# EAGLE board CANdiy-Shield_v12 (EAGLE 6.4)
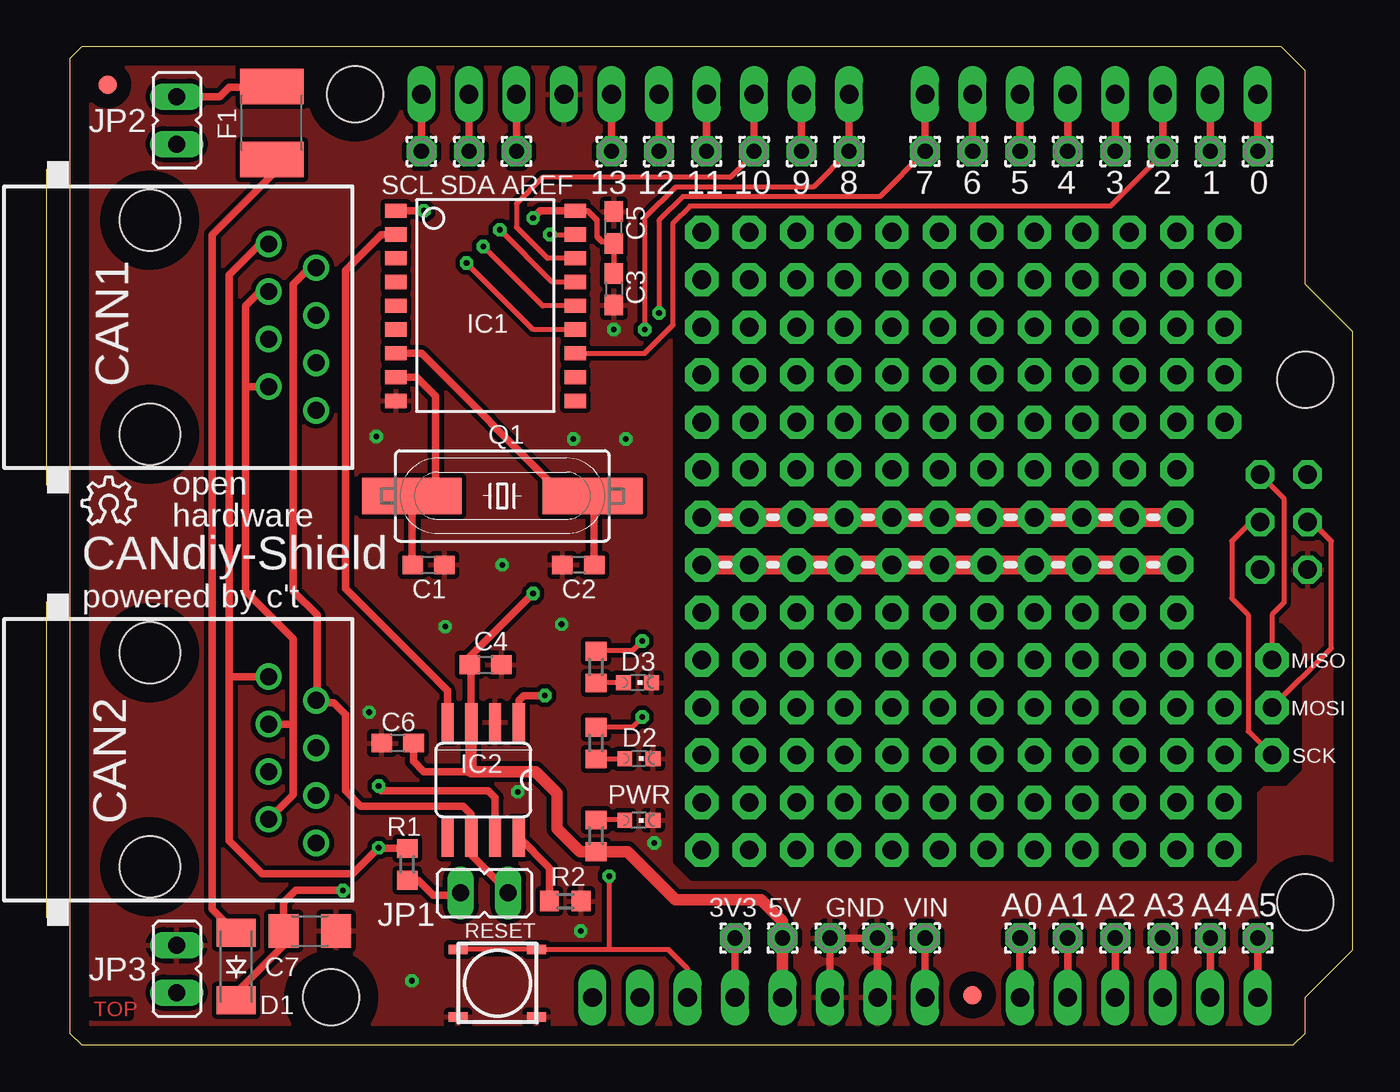
[diagram p0: board, top side]
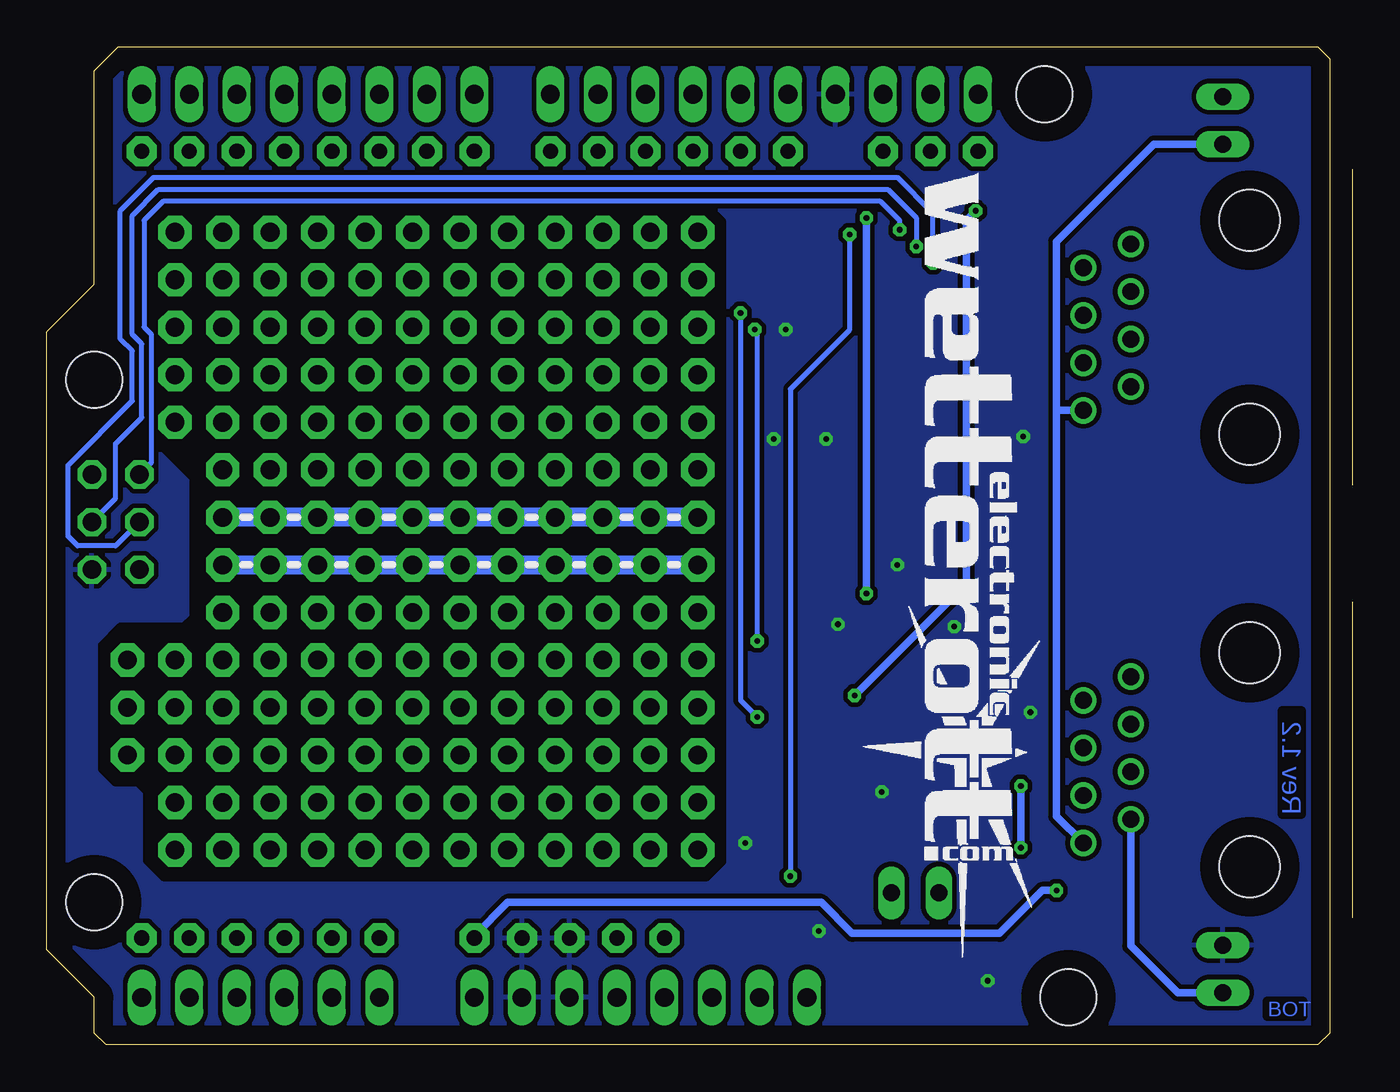
[diagram p1: board, bottom side, seen from below]

Size 69.81 x 53.34 mm. Coordinates in mm from the lower left corner, seen from the top.
Copper layers (1*16): Top 0.035mm / dielectric 1.5mm / Bottom 0.035mm
Design rules "default *": minimum track width 8mil, minimum drill 0.3mm, track to track 8mil, track to pad 8mil, pad to pad 8mil, via to via 8mil, smd to smd 8mil, copper to edge 40mil, drill to drill 8mil, minimum pad ring 10mil, minimum via ring 8mil, stop-mask expansion 4mil, vias tented up to drill 0.6mm, thermal gap 10mil

## Footprints (pad centres in the part's own frame; a part is rotated, then mirrored left to right if it is on the bottom)
1,6/0,8 = drill 0.813 pad 1.6 octagon: 1 0,0
UNO_ISP = drill 1 long: 0 63.5,50.8; 1 60.96,50.8; 2 58.42,50.8; 3 55.88,50.8; 3V3 35.56,2.54; 4 53.34,50.8; 5 50.8,50.8; 5V 38.1,2.54; 6 48.26,50.8; 7 45.72,50.8; 8 41.656,50.8; 9 39.116,50.8; 10 36.576,50.8; 11 34.036,50.8; 12 31.496,50.8; 13 28.956,50.8; AIN0 50.8,2.54; AIN1 53.34,2.54; AIN2 55.88,2.54; AIN3 58.42,2.54; AIN4 60.96,2.54; AIN5 63.5,2.54; AREF 23.876,50.8; GND@1 40.64,2.54; GND@2 43.18,2.54; GND@3 26.416,50.8; IOREF 30.48,2.54; NC 27.94,2.54; RST 33.02,2.54; SCL 18.796,50.8; SDA 21.336,50.8; VIN 45.72,2.54 | drill 1 octagon: GND@4 66.167,25.4; MISO 63.627,30.48; MOSI 66.167,27.94; RST2 63.627,25.4; SCK 63.627,27.94; VCC 66.167,30.48 | hole 3: 66.04,35.56; 66.04,7.62; 15.24,50.8; 13.97,2.54
C0603 = smd 1.1 x 1: 1 -0.85,0; 2 0.85,0
C1206 = smd 1.6 x 1.8: 1 -1.4,0; 2 1.4,0
RJ45-NO-SHIELD = drill 0.9 pad 1.4: 1 -4.445,6.35; 2 -3.175,8.89; 3 -1.905,6.35; 4 -0.635,8.89; 5 0.635,6.35; 6 1.905,8.89; 7 3.175,6.35; 8 4.445,8.89 | hole 3.251: -5.715,0; 5.715,0
SOD-123_MINI-SMA = smd 1.5 x 2.1: A 1.8,0; C -1.8,0
CHIPLED_0603 = smd 0.8 x 0.8: A 0,-0.75; C 0,0.75
L1812 = smd 1.9 x 3.4: 1 -1.95,0; 2 1.95,0
SO-18W = smd 0.762 x 1.143: 1 -5.08,-4.788; 2 -3.81,-4.788; 3 -2.54,-4.788; 4 -1.27,-4.788; 5 0,-4.788; 6 1.27,-4.788; 7 2.54,-4.788; 8 3.81,-4.788; 9 5.08,-4.788; 10 5.08,4.788; 11 3.81,4.788; 12 2.54,4.788; 13 1.27,4.788; 14 0,4.788; 15 -1.27,4.788; 16 -2.54,4.788; 17 -3.81,4.788; 18 -5.08,4.788
SO08 = smd 0.66 x 2.032: 1 -1.905,-3.073; 2 -0.635,-3.073; 3 0.635,-3.073; 4 1.905,-3.073; 5 1.905,3.073; 6 0.635,3.073; 7 -0.635,3.073; 8 -1.905,3.073
JP1 = drill 0.914 long: 1 0,-1.27; 2 0,1.27
HC49UP = smd 5.334 x 1.93: 1 -4.826,0; 2 4.826,0
R0603 = smd 1 x 1.1: 1 -0.85,0; 2 0.85,0
SW_SMD4 = smd 0.508 x 1.016: 1 -1.8,-2.1; 2 1.8,-2.1; 3 1.8,2.1; 4 -1.8,2.1
ROUND_1MM = smd 1 x 1: P$1 0,0

## Placement (x,y rotation side)
0  [1,6/0,8]  64.73,47.75 180 top
1  [1,6/0,8]  62.19,47.75 180 top
2  [1,6/0,8]  59.65,47.75 180 top
3  [1,6/0,8]  57.11,47.75 180 top
3V3  [1,6/0,8]  36.79,5.71 0 top
4  [1,6/0,8]  54.57,47.75 180 top
5  [1,6/0,8]  52.03,47.75 180 top
5V  [1,6/0,8]  39.33,5.71 0 top
6  [1,6/0,8]  49.49,47.75 180 top
7  [1,6/0,8]  46.95,47.75 180 top
8  [1,6/0,8]  42.89,47.75 180 top
9  [1,6/0,8]  40.35,47.75 180 top
10  [1,6/0,8]  37.81,47.75 180 top
11  [1,6/0,8]  35.27,47.75 180 top
12  [1,6/0,8]  32.73,47.75 180 top
13  [1,6/0,8]  30.19,47.75 180 top
A0  [1,6/0,8]  52.03,5.71 0 top
A1  [1,6/0,8]  54.57,5.71 0 top
A2  [1,6/0,8]  57.11,5.71 0 top
A3  [1,6/0,8]  59.65,5.71 0 top
A4  [1,6/0,8]  62.19,5.71 0 top
A5  [1,6/0,8]  64.73,5.71 0 top
ARD  UNO_ISP  [UNO_ISP]  1.23,0 0 top
AREF  [1,6/0,8]  25.11,47.75 0 top
C1  22p  [C0603]  20.41,25.65 0 top
C2  22p  [C0603]  28.41,25.65 180 top
C3  2µ2  [C0603]  30.31,40.39 270 top
C4  100nF  [C0603]  23.46,20.32 0 top
C5  100nF  [C0603]  30.31,43.69 90 top
C6  2µ2  [C0603]  18.76,16.13 180 top
C7  4µ7  [C1206]  14.06,6.1 0 top
CAN1  RJ45-6L-B  [RJ45-NO-SHIELD]  5.51,38.35 270 top
CAN2  RJ45-6L-B  [RJ45-NO-SHIELD]  5.51,15.24 270 top
D1  [SOD-123_MINI-SMA]  10.12,4.19 90 top
D2  [CHIPLED_0603]  31.65,15.3 270 top
D3  [CHIPLED_0603]  31.58,19.37 270 top
F1  F1  [L1812]  12.03,49.28 90 top
GND  [1,6/0,8]  41.87,5.71 0 top
GND.  [1,6/0,8]  44.41,5.71 0 top
IC1  [SO-18W]  23.46,39.5 270 top
IC2  MCP2551SO8  [SO08]  23.33,14.16 180 top
JP1  [JP1]  23.39,8.13 90 top
JP2  [JP1]  6.95,49.4 0 top
JP3  [JP1]  6.95,4.06 0 top
LOGO2  OSHW_LOGO_6MILX0100-NT  [OSHW_6X100_NOTEXT]  1.9,27.81 0 top
PWR  [CHIPLED_0603]  31.65,12 270 top
Q1  16MHz  [HC49UP]  24.35,29.34 180 top
R1  120  [R0603]  19.27,9.65 90 top
R2  100k  [R0603]  27.71,7.68 0 top
R3  1k  [R0603]  29.36,20.19 270 top
R4  1k  [R0603]  29.36,11.18 90 top
R5  1k  [R0603]  29.36,16.13 270 top
RESET  SW_SMDS  [SW_SMD4]  24.09,3.3 270 top
SCL  [1,6/0,8]  20.03,47.75 180 top
SDA  [1,6/0,8]  22.57,47.75 180 top
U$1  WE-LOGO  [WE-LOGO]  26.5,46.86 270 bottom
VIN  [1,6/0,8]  46.95,5.71 0 top
X_1  PASS_1MM  [ROUND_1MM]  3.26,51.31 0 top
X_2  PASS_1MM  [ROUND_1MM]  49.49,2.67 0 top

## Library data of the parts
0 1-3 3V3 4 5 5V 6-13 A0 A1-A5 AREF GND GND. SCL SDA VIN = wirepad
ARD = Arduino
C1-C7 F1 R1 R2 = resistor
CAN1 CAN2 = con-tycoelectronics; MPN: RJ45-6L-B; OC_FARNELL: unknown; OC_NEWARK: 16R6090
D1 = diode
D2 D3 PWR = led
IC1 IC2 = can
JP1-JP3 = jumper
LOGO2 = OSHW
Q1 = crystal; OC_FARNELL: unknown; OC_NEWARK: unknown
R3-R5 = rcl
RESET = Switch-SMD
U$1 = welectronic
X_1 X_2 = marks

## Nets
3V3: 3V3.1 ARD.3V3
5V: 5V.1 ARD.5V C3.1 C4.1 C5.1 C6.1 IC1.18 IC2.3 R4.1
7: 7.1 ARD.7 R5.1
8: 8.1 ARD.8 R3.1
9: 9.1 ARD.9
A0: A0.1 ARD.AIN0
AERF: ARD.AREF AREF.1
CANH: CAN1.1 CAN2.1 IC2.7 R1.2
CANL: CAN1.2 CAN2.2 IC2.6 JP1.1
CS: 10.1 ARD.10 IC1.16
GND: ARD.GND@1 ARD.GND@2 ARD.GND@3 ARD.GND@4 C1.2 C2.2 C3.2 C4.2 C5.2 C6.2 C7.2 D2.C D3.C GND.1 GND..1 IC1.9 IC2.2 JP3.2 PWR.C R2.2 RESET.2 RESET.3
INT: 2.1 ARD.2 IC1.12
IOREF: ARD.IOREF
N$4: C2.1 IC1.7 Q1.1
N$5: C1.1 IC1.8 Q1.2
N$6: CAN1.8 CAN2.8 JP2.1
N$7: IC2.8 R2.1
N$8: CAN1.3 CAN1.7 CAN2.3 CAN2.7 JP3.1
N$9: JP1.2 R1.1
N$18: ARD.SCL SCL.1
N$19: ARD.SDA SDA.1
N$21: D3.A R3.2
N$22: PWR.A R4.2
N$23: D2.A R5.2
N$86: 11.1 ARD.11
N$87: 12.1 ARD.12
N$88: 13.1 ARD.13
N$98: 6.1 ARD.6
N$99: 5.1 ARD.5
N$100: 4.1 ARD.4
N$101: 3.1 ARD.3
N$102: 1.1 ARD.1
N$103: 0.1 ARD.0
N$114: A1.1 ARD.AIN1
N$115: A2.1 ARD.AIN2
N$116: A3.1 ARD.AIN3
N$117: A4.1 ARD.AIN4
N$118: A5.1 ARD.AIN5
N$120: D1.A F1.1
N$121: F1.2 JP2.2
RESET: ARD.RST IC1.17 RESET.1 RESET.4
RXCAN: IC1.2 IC2.4
SCK: ARD.SCK IC1.13
SI: ARD.MOSI IC1.14
SO: ARD.MISO IC1.15
TXCAN: IC1.1 IC2.1
VIN: ARD.VIN C7.1 D1.C VIN.1

## Tracks (layer width: path | path; a pad name or v marks a point on that pad's centre or on a via)
3V3
  Top 0.406: ARD.3V3 3V3.1
5V  (via drill 0.3)
  Top 0.305: C3.1 C5.1 30.23,42.93 29.68,42.93 29.43,43.18 29.43,44.07 28.92,44.58 IC1.18
  Top 0.406: C6.1 19.61,15.15 20.15,14.61 22.69,14.61 | v26,44.2 26.38,44.58 IC1.18 | IC2.3 22.69,20.23 C4.1 22.61,20.74 v26,24.13
  Top 0.61: ARD.5V 5V.1 39.33,6.6 38.19,7.75 33.62,7.75 31.04,10.33 R4.1 28.5,10.33 27.27,11.56 27.27,13.46 26.12,14.61 22.69,14.61 IC2.3
  Bottom 0.406: v26,24.13 v26,44.2
7  (via drill 0.3)
  Top 0.254: 7.1 44.54,45.34 34,45.34 32.73,44.07 v32.73,39.12 | R5.1 29.4,17.02 31.33,17.02 v31.84,17.53
  Top 0.406: ARD.7 7.1
  Bottom 0.254: v32.73,39.12 32.73,18.41 v31.84,17.53
8  (via drill 0.3)
  Top 0.254: 8.1 40.98,45.85 33.62,45.85 31.97,44.2 v31.97,38.23 | R3.1 29.4,21.08 31.33,21.08 v31.84,21.59
  Top 0.406: ARD.8 8.1
  Bottom 0.254: v31.97,38.23 31.84,38.1 v31.84,21.59
9
  Top 0.406: ARD.9 9.1
A0
  Top 0.406: ARD.AIN0 A0.1
AERF
  Top 0.406: AREF.1 ARD.AREF
CANH  (via drill 0.3)
  Top 0.406: 9.74,19.68 9.74,41.15 11.39,42.8 CAN1.1 | 9.74,19.68 9.74,10.92 11.52,9.14 16.34,9.14 v17.74,10.54 17.78,10.5 R1.2 | CAN2.1 9.74,19.68 | IC2.7 23.96,13.21 23.58,13.59 17.87,13.59 17.74,13.72 v17.74,13.84
  Bottom 0.406: v17.74,13.84 v17.74,10.54
CANL
  Top 0.406: JP1.1 24.66,8.19 22.69,10.16 IC2.6 22.69,12.32 22.25,12.76 16.79,12.76 15.96,13.59 15.96,17.65 15.33,18.29 14.53,18.29 CAN2.2 14.44,18.45 14.44,22.99 13.17,24.26 13.17,40.64 14.06,41.53 CAN1.2
CS
  Top 0.254: 10.1 37.81,47.62 36.54,46.36 26.5,46.36 25.11,44.96 25.11,43.69 26.76,42.04 IC1.16
  Top 0.406: ARD.10 10.1
GND  (via drill 0.3)
  Top 0.406: ARD.GND@1 GND.1 GND..1 ARD.GND@2
  other vias: 28.16,32.39 21.3,22.35 17.61,32.51 25.17,13.53 32.47,10.79 30.31,38.23 27.52,22.48 24.35,25.65 19.52,3.43 28.54,6.1 17.23,17.78 30.95,32.39
  pour Bottom (isolate 0.254): 1.23,53.47 69.81,53.47 69.81,0.13 1.23,0.13
  pour Top (isolate 0.254): 1.23,0.13 1.23,53.47 69.81,53.47 69.81,0.13
INT
  Top 0.254: 2.1 59.65,47.62 56.86,44.83 34.38,44.83 33.49,43.94 33.49,38.48 31.97,36.96 IC1.12
  Top 0.406: ARD.2 2.1
N$4
  Top 0.406: IC1.7 20.03,36.96 27.39,29.59 28.92,29.59 Q1.1 29.26,29.25 C2.1
N$5
  Top 0.406: IC1.8 19.77,35.69 20.79,34.67 20.79,30.23 20.54,29.97 20.15,29.97 Q1.2 19.52,25.69 C1.1
N$6
  Bottom 0.406: 15.84,33.91 15.84,42.93 10.63,48.13 JP2.1 | 15.84,33.91 15.84,12.23 CAN2.8 | CAN1.8 15.84,33.91
N$7
  Top 0.406: R2.1 26.89,7.71 26.89,9.44 IC2.8
N$8
  Top 0.406: 10.63,35.05 10.63,39.5 11.39,40.26 CAN1.3 | 10.63,35.05 10.63,24.26 13.17,21.72 13.17,17.27 | 13.17,17.27 13.17,13.37 CAN2.7 | CAN2.3 13.04,17.14 13.17,17.27 | CAN1.7 10.76,35.18 10.63,35.05
  Bottom 0.406: CAN2.7 11.86,5.3 9.36,2.79 JP3.1
N$9
  Top 0.406: R1.1 19.86,8.8 20.66,8 22,8 JP1.2
N$10  (via drill 1 pad 1.78)
  other vias: 60.41,35.81
N$11  (via drill 1 pad 1.78)
  other vias: 57.87,35.81
N$12  (via drill 1 pad 1.78)
  other vias: 55.33,35.81
N$14  (via drill 1 pad 1.78)
  other vias: 52.79,35.81
N$15  (via drill 1 pad 1.78)
  other vias: 50.25,35.81
N$16  (via drill 1 pad 1.78)
  other vias: 47.71,35.81
N$17  (via drill 1 pad 1.78)
  other vias: 45.17,35.81
N$18
  Top 0.406: SCL.1 ARD.SCL
N$19
  Top 0.406: SDA.1 ARD.SDA
N$20  (via drill 1 pad 1.78)
  other vias: 42.63,38.35
N$21
  Top 0.254: D3.A 30.81,19.34 R3.2
N$22
  Top 0.254: PWR.A 30.87,12.03 R4.2
N$23
  Top 0.254: D2.A 30.87,15.28 R5.2
N$24  (via drill 1 pad 1.78)
  other vias: 42.63,10.41
N$25  (via drill 1 pad 1.78)
  other vias: 42.63,35.81
N$26  (via drill 1 pad 1.78)
  other vias: 62.95,38.35
N$27  (via drill 1 pad 1.78)
  other vias: 60.41,38.35
N$28  (via drill 1 pad 1.78)
  other vias: 57.87,38.35
N$29  (via drill 1 pad 1.78)
  other vias: 55.33,38.35
N$30  (via drill 1 pad 1.78)
  other vias: 52.79,38.35
N$31  (via drill 1 pad 1.78)
  other vias: 50.25,38.35
N$32  (via drill 1 pad 1.78)
  other vias: 47.71,38.35
N$33  (via drill 1 pad 1.78)
  other vias: 45.17,38.35
N$34  (via drill 1 pad 1.78)
  other vias: 42.63,33.27
N$35  (via drill 1 pad 1.78)
  other vias: 42.63,30.73
N$36  (via drill 1 pad 1.78)
  other vias: 42.63,28.19
N$37  (via drill 1 pad 1.78)
  other vias: 62.95,40.89
N$38  (via drill 1 pad 1.78)
  other vias: 60.41,40.89
N$39  (via drill 1 pad 1.78)
  other vias: 57.87,40.89
N$40  (via drill 1 pad 1.78)
  other vias: 55.33,40.89
N$41  (via drill 1 pad 1.78)
  other vias: 62.95,20.57
N$42  (via drill 1 pad 1.78)
  other vias: 62.95,10.41
N$43  (via drill 1 pad 1.78)
  other vias: 60.41,10.41
N$44  (via drill 1 pad 1.78)
  other vias: 57.87,10.41
N$45  (via drill 1 pad 1.78)
  other vias: 55.33,10.41
N$46  (via drill 1 pad 1.78)
  other vias: 52.79,10.41
N$47  (via drill 1 pad 1.78)
  other vias: 50.25,10.41
N$48  (via drill 1 pad 1.78)
  other vias: 47.71,10.41
N$49  (via drill 1 pad 1.78)
  other vias: 45.17,10.41
N$50  (via drill 1 pad 1.78)
  other vias: 52.79,40.89
N$51  (via drill 1 pad 1.78)
  other vias: 50.25,40.89
N$52  (via drill 1 pad 1.78)
  other vias: 47.71,40.89
N$53  (via drill 1 pad 1.78)
  other vias: 45.17,40.89
N$54  (via drill 1 pad 1.78)
  other vias: 42.63,25.65
N$55  (via drill 1 pad 1.78)
  other vias: 62.95,43.43
N$56  (via drill 1 pad 1.78)
  other vias: 60.41,43.43
N$57  (via drill 1 pad 1.78)
  other vias: 57.87,43.43
N$58  (via drill 1 pad 1.78)
  other vias: 55.33,43.43
N$59  (via drill 1 pad 1.78)
  other vias: 60.41,33.27
N$60  (via drill 1 pad 1.78)
  other vias: 57.87,33.27
N$61  (via drill 1 pad 1.78)
  other vias: 55.33,33.27
N$62  (via drill 1 pad 1.78)
  other vias: 52.79,33.27
N$63  (via drill 1 pad 1.78)
  other vias: 50.25,33.27
N$64  (via drill 1 pad 1.78)
  other vias: 47.71,33.27
N$65  (via drill 1 pad 1.78)
  other vias: 45.17,33.27
N$66  (via drill 1 pad 1.78)
  other vias: 52.79,43.43
N$67  (via drill 1 pad 1.78)
  other vias: 50.25,43.43
N$68  (via drill 1 pad 1.78)
  other vias: 47.71,43.43
N$69  (via drill 1 pad 1.78)
  other vias: 45.17,43.43
N$70  (via drill 1 pad 1.78)
  other vias: 42.63,23.11
N$71  (via drill 1 pad 1.78)
  other vias: 40.09,10.41
N$72  (via drill 1 pad 1.78)
  other vias: 62.95,18.03
N$73  (via drill 1 pad 1.78)
  other vias: 62.95,15.49
N$74  (via drill 1 pad 1.78)
  other vias: 62.95,12.95
N$75  (via drill 1 pad 1.78)
  other vias: 60.41,30.73
N$76  (via drill 1 pad 1.78)
  other vias: 57.87,30.73
N$77  (via drill 1 pad 1.78)
  other vias: 55.33,30.73
N$78  (via drill 1 pad 1.78)
  other vias: 52.79,30.73
N$79  (via drill 1 pad 1.78)
  other vias: 50.25,30.73
N$80  (via drill 1 pad 1.78)
  other vias: 47.71,30.73
N$81  (via drill 1 pad 1.78)
  other vias: 45.17,30.73
N$82  (via drill 1 pad 1.78)
  other vias: 42.63,20.57
N$83  (via drill 1 pad 1.78)
  other vias: 42.63,18.03
N$84  (via drill 1 pad 1.78)
  other vias: 42.63,15.49
N$85  (via drill 1 pad 1.78)
  other vias: 42.63,12.95
N$86
  Top 0.406: 11.1 ARD.11
N$87
  Top 0.406: 12.1 ARD.12
N$88
  Top 0.406: 13.1 ARD.13
N$89  (via drill 1 pad 1.78)
  other vias: 37.55,10.41
N$90  (via drill 1 pad 1.78)
  other vias: 42.63,40.89
N$91
  cutout Top: 33.62,43.88 34.44,44.83 63.84,44.83 64.41,44.26 64.41,32.64 62.06,30.29 62.06,22.86 62.51,22.42 65.94,22.42 66.95,21.4 66.95,14.73 66.19,13.97 64.99,13.97 64.54,13.53 64.54,9.84 63.59,8.89 34.51,8.89 33.62,9.78 33.62,44.07
N$92  (via drill 1 pad 1.78)
  other vias: 57.87,28.19
N$93  (via drill 1 pad 1.78)
  other vias: 55.33,28.19
N$94  (via drill 1 pad 1.78)
  other vias: 52.79,28.19
N$95  (via drill 1 pad 1.78)
  other vias: 50.25,28.19
N$96  (via drill 1 pad 1.78)
  other vias: 47.71,28.19
N$97  (via drill 1 pad 1.78)
  other vias: 45.17,28.19
N$98
  Top 0.406: ARD.6 6.1
N$99
  Top 0.406: ARD.5 5.1
N$100
  Top 0.406: ARD.4 4.1
N$101
  Top 0.406: ARD.3 3.1
N$102
  Top 0.406: ARD.1 1.1
N$103
  Top 0.406: ARD.0 0.1
N$104  (via drill 1 pad 1.78)
  other vias: 42.63,43.43
N$107  (via drill 1 pad 1.78)
  Top 1.016: 35.14,25.65 v60.41,25.65
  Bottom 1.016: v60.41,25.65 35.14,25.65
N$108  (via drill 1 pad 1.78)
  other vias: 57.87,25.65
N$109  (via drill 1 pad 1.78)
  other vias: 55.33,25.65
N$110  (via drill 1 pad 1.78)
  other vias: 52.79,25.65
N$111  (via drill 1 pad 1.78)
  other vias: 50.25,25.65
N$112  (via drill 1 pad 1.78)
  other vias: 47.71,25.65
N$113  (via drill 1 pad 1.78)
  other vias: 45.17,25.65
N$114
  Top 0.406: ARD.AIN1 A1.1
N$115
  Top 0.406: ARD.AIN2 A2.1
N$116
  Top 0.406: ARD.AIN3 A3.1
N$117
  Top 0.406: ARD.AIN4 A4.1
N$118
  Top 0.406: ARD.AIN5 A5.1
N$119  (via drill 1 pad 1.78)
  other vias: 62.95,35.81
N$120
  Top 0.406: F1.1 12.03,46.48 8.85,43.31 8.85,7.26 D1.A
N$121
  Top 0.406: F1.2 11.98,51.18 9.74,51.18 9.23,50.67 JP2.2
N$122
  cutout Bottom: 33.62,44.01 34.44,44.83 63.84,44.83 64.41,44.26 64.41,32.64 62.06,30.29 62.06,22.86 62.51,22.42 65.94,22.42 66.95,21.4 66.95,14.73 66.19,13.97 64.99,13.97 64.54,13.53 64.54,9.84 63.59,8.89 34.51,8.89 33.62,9.78
N$123  (via drill 1 pad 1.78)
  other vias: 60.41,23.11
N$124  (via drill 1 pad 1.78)
  other vias: 57.87,23.11
N$125  (via drill 1 pad 1.78)
  other vias: 55.33,23.11
N$126  (via drill 1 pad 1.78)
  other vias: 52.79,23.11
N$127  (via drill 1 pad 1.78)
  other vias: 50.25,23.11
N$128  (via drill 1 pad 1.78)
  other vias: 47.71,23.11
N$129  (via drill 1 pad 1.78)
  other vias: 45.17,23.11
N$130  (via drill 1 pad 1.78)
  other vias: 40.09,38.35
N$131  (via drill 1 pad 1.78)
  other vias: 37.55,38.35
N$132  (via drill 1 pad 1.78)
  other vias: 40.09,35.81
N$133  (via drill 1 pad 1.78)
  other vias: 37.55,35.81
N$134  (via drill 1 pad 1.78)
  other vias: 40.09,33.27
N$135  (via drill 1 pad 1.78)
  other vias: 37.55,33.27
N$136  (via drill 1 pad 1.78)
  other vias: 40.09,30.73
N$137  (via drill 1 pad 1.78)
  other vias: 37.55,30.73
N$138  (via drill 1 pad 1.78)
  other vias: 40.09,28.19
N$139  (via drill 1 pad 1.78)
  other vias: 60.41,20.57
N$140  (via drill 1 pad 1.78)
  other vias: 57.87,20.57
N$141  (via drill 1 pad 1.78)
  other vias: 55.33,20.57
N$142  (via drill 1 pad 1.78)
  other vias: 52.79,20.57
N$143  (via drill 1 pad 1.78)
  other vias: 50.25,20.57
N$144  (via drill 1 pad 1.78)
  other vias: 47.71,20.57
N$145  (via drill 1 pad 1.78)
  other vias: 45.17,20.57
N$146  (via drill 1 pad 1.78)
  other vias: 37.55,28.19
N$147  (via drill 1 pad 1.78)
  other vias: 40.09,40.89
N$148  (via drill 1 pad 1.78)
  other vias: 37.55,40.89
N$149  (via drill 1 pad 1.78)
  other vias: 40.09,43.43
N$150  (via drill 1 pad 1.78)
  other vias: 37.55,43.43
N$151  (via drill 1 pad 1.78)
  other vias: 35.01,38.35
N$152  (via drill 1 pad 1.78)
  other vias: 35.01,35.81
N$153  (via drill 1 pad 1.78)
  other vias: 35.01,33.27
N$154  (via drill 1 pad 1.78)
  other vias: 35.01,30.73
N$155  (via drill 1 pad 1.78)
  other vias: 60.41,18.03
N$156  (via drill 1 pad 1.78)
  other vias: 57.87,18.03
N$157  (via drill 1 pad 1.78)
  other vias: 55.33,18.03
N$158  (via drill 1 pad 1.78)
  other vias: 52.79,18.03
N$159  (via drill 1 pad 1.78)
  other vias: 50.25,18.03
N$160  (via drill 1 pad 1.78)
  other vias: 47.71,18.03
N$161  (via drill 1 pad 1.78)
  other vias: 45.17,18.03
N$162  (via drill 1 pad 1.78)
  Top 1.016: v35.01,28.19 v60.41,28.19
  Bottom 1.016: v35.01,28.19 v60.41,28.19
N$163  (via drill 1 pad 1.78)
  other vias: 35.01,40.89
N$164  (via drill 1 pad 1.78)
  other vias: 35.01,43.43
N$165  (via drill 1 pad 1.78)
  other vias: 40.09,25.65
N$166  (via drill 1 pad 1.78)
  other vias: 37.55,25.65
N$167  (via drill 1 pad 1.78)
  other vias: 40.09,23.11
N$168  (via drill 1 pad 1.78)
  other vias: 37.55,23.11
N$169  (via drill 1 pad 1.78)
  other vias: 40.09,20.57
N$171  (via drill 1 pad 1.78)
  other vias: 60.41,15.49
N$172  (via drill 1 pad 1.78)
  other vias: 57.87,15.49
N$173  (via drill 1 pad 1.78)
  other vias: 55.33,15.49
N$174  (via drill 1 pad 1.78)
  other vias: 52.79,15.49
N$175  (via drill 1 pad 1.78)
  other vias: 50.25,15.49
N$176  (via drill 1 pad 1.78)
  other vias: 47.71,15.49
N$177  (via drill 1 pad 1.78)
  other vias: 45.17,15.49
N$178  (via drill 1 pad 1.78)
  other vias: 37.55,20.57
N$179  (via drill 1 pad 1.78)
  other vias: 40.09,18.03
N$180  (via drill 1 pad 1.78)
  other vias: 37.55,18.03
N$181  (via drill 1 pad 1.78)
  other vias: 40.09,15.49
N$182  (via drill 1 pad 1.78)
  other vias: 37.55,15.49
N$183  (via drill 1 pad 1.78)
  other vias: 40.09,12.95
N$184  (via drill 1 pad 1.78)
  other vias: 37.55,12.95
N$185  (via drill 1 pad 1.78)
  other vias: 35.01,10.41
N$186  (via drill 1 pad 1.78)
  other vias: 35.01,25.65
N$187  (via drill 1 pad 1.78)
  other vias: 60.41,12.95
N$188  (via drill 1 pad 1.78)
  other vias: 57.87,12.95
N$189  (via drill 1 pad 1.78)
  other vias: 55.33,12.95
N$190  (via drill 1 pad 1.78)
  other vias: 52.79,12.95
N$191  (via drill 1 pad 1.78)
  other vias: 50.25,12.95
N$192  (via drill 1 pad 1.78)
  other vias: 47.71,12.95
N$193  (via drill 1 pad 1.78)
  other vias: 45.17,12.95
N$194  (via drill 1 pad 1.78)
  other vias: 35.01,23.11
N$195  (via drill 1 pad 1.78)
  other vias: 35.01,20.57
N$196  (via drill 1 pad 1.78)
  other vias: 35.01,18.03
N$197  (via drill 1 pad 1.78)
  other vias: 35.01,15.49
N$198  (via drill 1 pad 1.78)
  other vias: 35.01,12.95
N$2512  (via drill 1 pad 1.78)
  other vias: 62.95,33.27
RESET  (via drill 0.3)
  Top 0.254: 30.06,5.1 RESET.4 RESET.1 | 30.06,5.1 33.21,5.1 34.25,4.06 ARD.RST | v30.06,9.02 30.06,5.1 | v26.89,43.31 IC1.17
  Bottom 0.254: v30.06,9.02 30.06,35.05 26.89,38.23 v26.89,43.31
RXCAN
  Top 0.406: IC2.4 21.42,18.92 15.96,24.38 15.96,41.4 17.87,43.31 IC1.2
SCK  (via drill 0.3, 1 pad 1.78)
  Top 0.254: ARD.SCK 64.35,27.94 63.33,26.92 63.33,23.88 64.22,22.99 64.22,16.76 v65.49,15.49 | IC1.13 26,38.23 v22.44,41.78
  Bottom 0.254: ARD.SCK 66.13,26.67 68.16,26.67 68.67,27.18 68.67,30.99 65.24,34.42 65.24,37.08 65.87,37.72 65.87,44.58 64.1,46.36 24.35,46.36 22.44,44.45 v22.44,41.78
SI  (via drill 0.3, 1 pad 1.78)
  Top 0.254: v65.49,18.03 68.67,21.21 68.67,26.92 67.65,27.94 ARD.MOSI | IC1.14 26.5,39.5 v23.33,42.67
  Bottom 0.254: ARD.MOSI 66.13,29.21 66.13,32.13 64.73,33.53 64.73,37.47 65.24,37.97 65.24,44.32 63.84,45.72 24.85,45.72 23.33,44.2 v23.33,42.67
SO  (via drill 0.3, 1 pad 1.78)
  Top 0.254: ARD.MISO 66.13,29.21 66.13,23.62 65.49,22.99 v65.49,20.57 | IC1.15 27.01,40.77 v24.22,43.56
  Bottom 0.254: ARD.MISO 64.22,31.11 64.22,37.97 64.6,38.35 64.6,44.07 63.59,45.09 25.23,45.09 24.22,44.07 v24.22,43.56
TXCAN  (via drill 0.3)
  Top 0.406: v20.15,44.58 IC1.1 | IC2.1 25.23,18.41 25.49,18.67 v26.63,18.67
  Bottom 0.406: v26.63,18.67 20.66,24.64 20.66,44.07 v20.15,44.58
VIN  (via drill 0.3)
  Top 0.254: C7.1 12.66,5.33 12.47,5.14
  Top 0.406: v15.84,8.26 13.3,8.26 12.66,7.62 12.66,5.33 12.47,5.14 10.25,2.92 10.25,2.52 D1.C | ARD.VIN VIN.1
  Bottom 0.406: VIN.1 46.95,5.84 45.17,7.62 28.41,7.62 26.76,5.97 18.88,5.97 16.6,8.26 v15.84,8.26

## Text on the board
Top: TOP
Bottom: Rev 1.2 | BOT
tPlace: open | hardware | CANdiy-Shield | powered by c't | MISO | MOSI | SCK | 5V | GND